# Altium PCB PCB_bee.PcbDoc
Units mm, origin at the board's own origin, x right, y up, seen from the top; angles counter-clockwise.
Board outline 279.91 x 60.2 mm, 2 copper layers (Top Layer, Bottom Layer), stack 0.54 mm thick; 45 components, 24 nets, 183 pads, 44 vias.
Unrouted connection lines stored in the file: 1.
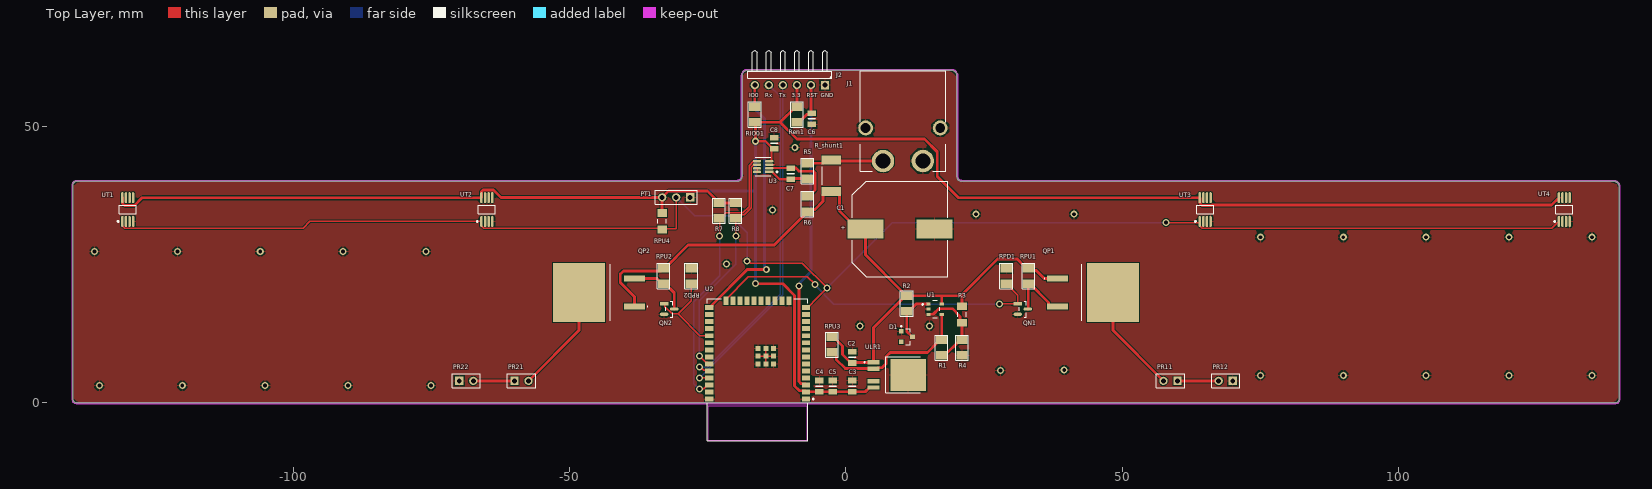
[diagram p0: Top Layer view]
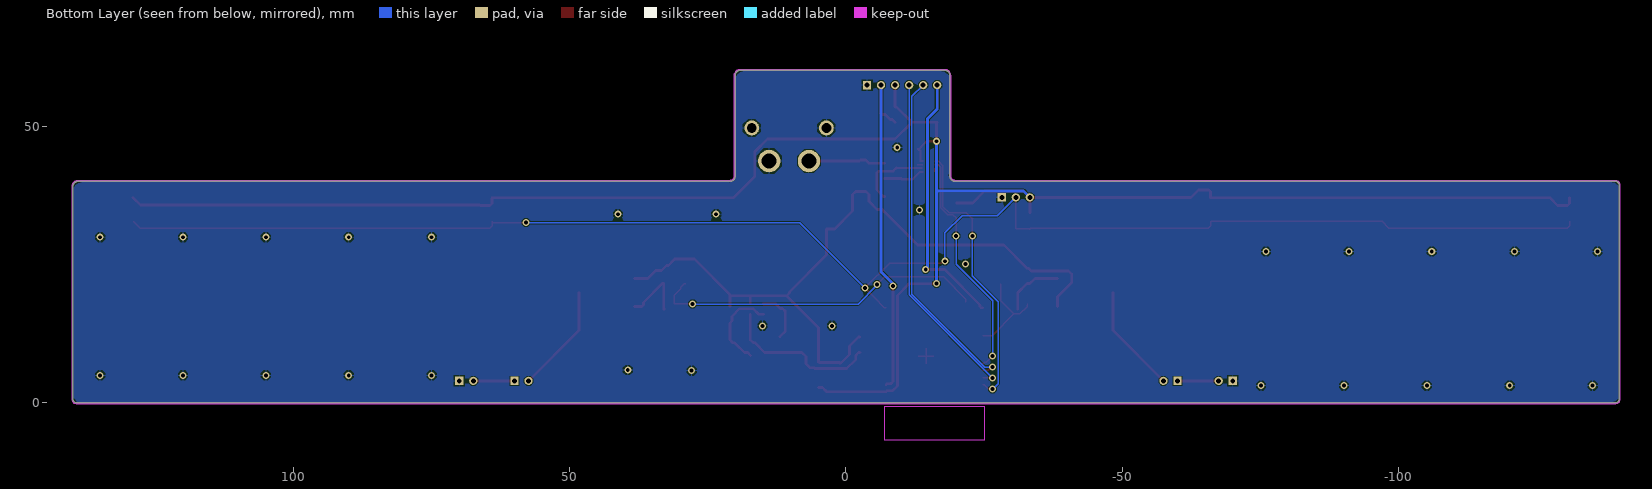
[diagram p1: Bottom Layer view, seen from below]
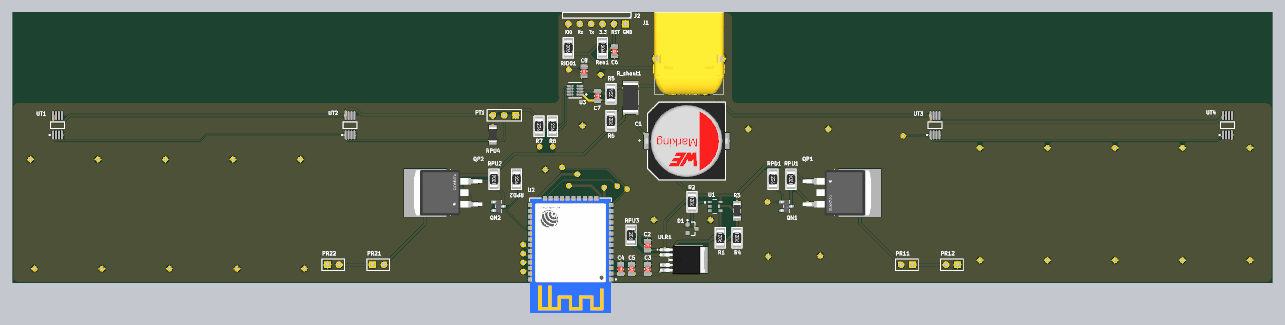
[diagram p2: 3D render of the assembled board from above, using the file's embedded part models]

## Layer stack, top to bottom
Top Solder: solder mask 0.23, Solder Resist, Dk 3.5
Top Layer: signal copper 0.07
Dielectric 1: dielectric 0.4, FR-4, Dk 4.8
Bottom Layer: signal copper 0.07
Bottom Solder: solder mask 0.23, Solder Resist, Dk 3.5

## Board outline
-18.796,41.021 -18.796,59.309 cw(c-17.907,59.309) -17.907,60.198 19.177,60.198 cw(c19.177,59.309) 20.066,59.309 20.066,41.021 ccw(c20.955,41.021) 20.955,40.132 138.938,40.132 cw(c138.938,39.116) 139.954,39.116 139.954,0.762 cw(c139.192,0.762) 139.192,0 -139.192,0 cw(c-139.192,0.762) -139.954,0.762 -139.954,39.37 cw(c-139.192,39.37) -139.192,40.132 -19.685,40.132 ccw(c-19.685,41.021)

## Design rules (kind name [scope] priority, off if disabled: settings)
Clearance Powerline [InNetClass('Power signal')] p1: gap=0.127 ignorepadtopadclearanceinfootprint=FALSE except(0.3: Arc-Arc Arc-Track Arc-Via Arc-Hole Track-Track Track-Via Track-Hole THPad-Via THPad-Hole Via-Via Via-Hole Fill-Hole Poly-Hole Region-Hole Text-Hole)
Clearance [All] p2: gap=0.127 ignorepadtopadclearanceinfootprint=FALSE
HoleSize [All] p1: absolutevalues=TRUE maxlimit=5.1 minlimit=0.025 maxpercent=80.000 minpercent=20.000
MinimumSolderMaskSliver [All] p1: minsoldermaskwidth=0.127
PolygonConnect [All] p1: connectstyle=Relief reliefconductorwidth=0.254 reliefentries=4 polygonreliefangle="90 Angle" airgapwidth=0.254
RoutingVias [All] p1: holewidth=0.711 width=1.27 viastyle="Through Hole" minholewidth=0.711 minwidth=1.27 maxholewidth=0.711 maxwidth=1.27
SilkToSolderMaskClearance [IsPad] p1: minsilkscreentomaskgap=0.127 clearancetoexposedcopper=TRUE
SolderMaskExpansion [All] p1: expansion=0.102 istentingtop=FALSE
UnRoutedNet [All] p1: checkbadconnections=TRUE
Width "Power width" [InNetClass('Power signal')] p1: maxlimit=0.51 minlimit=0.381 preferedwidth=0.51 minimp=50.000000 maximp=50.000000 favimp=50.000000
Width [All] p2: maxlimit=0.254 minlimit=0.127 preferedwidth=0.254 bottomlayer_minwidth=0.254 minimp=50.000000 maximp=50.000000 favimp=50.000000 checkconnectedcopper=TRUE
26 further rules are at their usual default settings.

## Classes and differential pairs
net class "Power signal": 3.3V Enable3.3 In+ In- IO0 NetC7_1 NetC7_2 NetPR11_1 NetPR21_1 NetQN1_3 NetQN2_3 Powerline Powerline2 ResistorIn ResistorIn2 RST_esp32

## Components (designator, comment, footprint, x,y, rotation, side; value= is the part's Value field where it differs from the comment)
C1 "865080663020" WCAP-ASLI_D16H17 9.779,31.496 r180 top
C2 "GCM21BR71H104KA37K" SMD-0805C 1.143,8.255 r180 top value=0.10µF
C3 "GRM21BR6YA106ME43L" SMD-0805C 1.143,3.048 r180 top value=10µF
C4 "GCM21BR71H104KA37K" SMD-0805C -4.826,3.048 r180 top value=0.10µF
C5 "GRM21BR6YA106ME43L" SMD-0805C -2.413,3.048 r180 top value=10µF
C6 "GRJ21BR71H105KE01L" SMD-0805C -6.223,51.435 r0 top value=1µF
C7 "GCM21BR71H104KA37K" SMD-0805C -10,41.5 r180 top value=0.10µF
C8 "GCM21BR71H104KA37K" SMD-0805C -13,47 r0 top value=0.10µF
D1 "BZX84C6V8LT1G" ONSC-SOT-23-3-318-08_V 11,12 r0 top
J1 "XT60PW-M" XT60PWM 10.306,43.784 r0 top locked
J2 "Header 6H" HDR1X6H -3.81,57.531 r180 top locked
PR11 "Header 2" HDR1X2 60,4 r180 top
PR12 "Header 2" HDR1X2 70,4 r180 top
PR21 "Header 2" HDR1X2 -60,4 r0 top
PR22 "Header 2" HDR1X2 -70,4 r0 top
PT1 "Header 3" HDR1X3 -28.194,37.211 r180 top
QN1 "BSS138" FP-318-08-IPC_B 32,17 r0 top
QN2 "BSS138" FP-318-08-IPC_B -32,17 r0 top
QP1 "FQB22P10TM" FQB22P10TM 45,20 r270 top
QP2 "FQB22P10TM" FQB22P10TM -45,20 r90 top
R1 "ERJ-P08J153V" SMD-1206-RES 17.272,10 r180 top value=15k
R2 "ERJ-P08J821V" SMD-1206-RES 11,18 r180 top value=820
R3 "Resistor 4k7 +/-1% 1206 250 mW" RESC3116X70X50ML13T20 21,16 r90 top value=4.7k
R4 "ERJ-P08J102V" SMD-1206-RES 21,10 r180 top value=1k
R5 "ERJ-8ENF10R2V" SMD-1206-RES -7,42 r0 top value=10.2
R6 "ERJ-8ENF10R2V" SMD-1206-RES -7,36 r180 top value=10.2
R7 "ERJ-8GEYJ332V" SMD-1206-RES -23,34.798 r180 top value=3.3k
R8 "ERJ-8GEYJ332V" SMD-1206-RES -20,34.798 r180 top value=3.3k
R_shunt1 "WSLT2512R5000FEA" RESC6432X89X76NL25T25 -2.667,41.148 r90 top
Ren1 "ERJ-P08J104V" SMD-1206-RES -8.89,52.197 r180 top value=100k
RIO01 "ERJ-P08J104V" SMD-1206-RES -16.51,52.197 r180 top value=100k
RPD1 "ERJ-P08J333V" SMD-1206-RES 29,23 r180 top value=33k
RPD2 "ERJ-P08J333V" SMD-1206-RES -28,23 r180 top value=33k
RPU1 "ERJ-P08J333V" SMD-1206-RES 33,23 r0 top value=33k
RPU2 "ERJ-P08J333V" SMD-1206-RES -33,23 r0 top value=33k
RPU3 "ERJ-P08J333V" SMD-1206-RES -2.54,10.541 r180 top value=33k
RPU4 "Resistor 4k7 +/-1% 1206 250 mW" RESC3116X70X50ML13T20 -33.274,32.893 r90 top value=4.7k
U1 "AP331AWG-7" FP-SOT25-MFG 16.129,17 r0 top
U2 "ESP32-WROOM-32E (16MB)" FP-ESP32-WROOM-32E_16MB-MFG -16,6 r180 top
U3 "INA219AIDCNR" FP-DCN0008A-IPC_B -15,42.799 r180 top
ULR1 "TLS850B0TEV33ATMA1" BTS6143D 8.353,5.083 r270 top
UT1 "DS18B20U+T&R" MAXM-U8+1_M -130,35 r90 top
UT2 "DS18B20U+T&R" MAXM-U8+1_M -65,35 r90 top
UT3 "DS18B20U+T&R" MAXM-U8+1_M 65,35 r90 top
UT4 "DS18B20U+T&R" MAXM-U8+1_M 130,35 r90 top

## Footprints (in the part's own frame and the unit in brackets; to place one, negate y for a bottom-side part, rotate by r counter-clockwise, add the part's x,y. Pads: shape width x height; smd on the part's side, far side on the other; paste and mask are expansions set on the pad)
BTS6143D [mm]
  rect 0.8x2.2 smd: 1(-2.28,-3.4) 2(-1.14,-3.4) 4(1.14,-3.4) 5(2.28,-3.4)
  rect 5.8x6.4 smd: 3(0,2.9)
  silkscreen extent -3.25,-5.1 3.25,5.1, body extent -3.25,-4.49 3.25,5.49, height 2.45
FP-318-08-IPC_B [mm]
  rect 1.524x0.578 smd paste+0 mask+0: 1(-0.91,0.95)
  rrect100% 1.524x0.578 smd paste+0 mask+0: 2(-0.91,-0.95) 3(0.91,0)
  silkscreen extent -0.65,-1.45 0.65,1.45, body extent -1.92,-1.7 1.92,1.7, height 0.25
FP-DCN0008A-IPC_B [mm]
  rect 1.505x0.455 smd paste+0 mask+0: 1(-1.1,0.975)
  rrect100% 1.505x0.455 smd paste+0 mask+0: 2(-1.1,0.325) 3(-1.1,-0.325) 4(-1.1,-0.975) 5(1.1,-0.975) 6(1.1,-0.325) 7(1.1,0.325) 8(1.1,0.975)
  silkscreen extent -2.63,-1.7 1.4,1.7, body extent -2.1,-1.7 2.1,1.7, height 0.25
FP-ESP32-WROOM-32E_16MB-MFG [mm]
  rect 1.5x0.9 smd paste+0 mask+0: 1(-8.75,5.26) 2(-8.75,3.99) 3(-8.75,2.72) 4(-8.75,1.45) 5(-8.75,0.18) 6(-8.75,-1.09) 7(-8.75,-2.36) 8(-8.75,-3.63) 9(-8.75,-4.9) 10(-8.75,-6.17) 11(-8.75,-7.44) 12(-8.75,-8.71) 13(-8.75,-9.98) 14(-8.75,-11.25) 25(8.75,-11.25) 26(8.75,-9.98) 27(8.75,-8.71) 28(8.75,-7.44) 29(8.75,-6.17) 30(8.75,-4.9) 31(8.75,-3.63) 32(8.75,-2.36) 33(8.75,-1.09) 34(8.75,0.18) 35(8.75,1.45) 36(8.75,2.72) 37(8.75,3.99) 38(8.75,5.26)
  rect 0.9x1.5 smd paste+0 mask+0: 15(-5.715,-12.5) 16(-4.445,-12.5) 17(-3.175,-12.5) 18(-1.905,-12.5) 19(-0.635,-12.5) 20(0.635,-12.5) 21(1.905,-12.5) 22(3.175,-12.5) 23(4.445,-12.5) 24(5.715,-12.5)
  rect 0.9x0.9 smd paste+0 mask+0: 39(-2.9,-1.06) 39(-2.9,-3.86) 39(-2.9,-2.46) 39(-1.5,-1.06) 39(-1.5,-2.46) 39(-1.5,-3.86) 39(-0.1,-1.06) 39(-0.1,-2.46) 39(-0.1,-3.86)
  Keep-Out Layer region: -9,6.562 9,6.562 9,12.752 -9,12.752
  silkscreen extent -10.2,-12.83 9.07,12.82, body extent -9.6,-13.35 9.6,12.93, height 0.25
FP-SOT25-MFG [mm]
  rect 0.8x0.55 smd paste+0 mask+0: 1(-1.2,0.95) 2(-1.2,0) 3(-1.2,-0.95) 4(1.2,-0.95) 5(1.2,0.95)
  silkscreen extent -2.37,-1.55 0.85,1.55, body extent -1.7,-1.65 1.7,1.65, height 0.25
FQB22P10TM [mm]
  rect 1.05x3.8 smd: 1(-2.54,-6.692) 3(2.54,-6.692)
  rect 10.67x9.45 smd: 2(0,3.307)
  silkscreen extent -5.08,-9.1 5.08,-2.32, body extent -5.08,-9.4 5.08,5.85, height 5.08
HDR1X2 [mm] "Connector; Header; 2 Position"
  rect 1.5x1.5 hole 0.9: 1(0,0)
  round 1.5 hole 0.9: 2(2.54,0)
  silkscreen extent -1.27,-1.27 3.81,1.27
HDR1X3 [mm] "Connector; Header; 3 Position"
  rect 1.5x1.5 hole 0.9: 1(0,0)
  round 1.5 hole 0.9: 2(2.54,0) 3(5.08,0)
  silkscreen extent -1.27,-1.27 6.35,1.27
HDR1X6H [mm] "Connector; Header; 6 Position; Right Angle"
  rect 1.5x1.5 hole 0.9: 1(0,0)
  round 1.5 hole 0.9: 2(2.54,0) 3(5.08,0) 4(7.62,0) 5(10.16,0) 6(12.7,0)
  silkscreen extent -1.27,-6.35 13.97,-1.27
MAXM-U8+1_M [mm] "SOP, 8-Leads, Body 3x3mm, Pitch 0.65mm, IPC Low Density"
  oval 2x0.45 smd: 1(-2.15,0.975) 2(-2.15,0.325) 3(-2.15,-0.325) 4(-2.15,-0.975) 5(2.15,-0.975) 6(2.15,-0.325) 7(2.15,0.325) 8(2.15,0.975)
  silkscreen extent -2.27,-1.55 0.75,1.87, body extent -1.55,-1.55 1.55,1.55, height 1.1
ONSC-SOT-23-3-318-08_V [mm] "SOT23, 3-Leads, Body 2.92x1.3mm, Pitch 0.95mm"
  rect 0.9x0.8 smd: 1(-1,0.95) 2(-1,-0.95) 3(1,0)
  silkscreen extent -1.12,-1.46 0.65,2.02, body extent -0.65,-1.46 0.65,1.46, height 1.11
RESC3116X70X50ML13T20 [mm] "Chip Resistor, 2-Leads, Body 3.25x1.65mm, IPC Low Density"
  rect 1.4x1.75 smd: 1(-1.5,0) 2(1.5,0)
  silkscreen extent -0.4,-0.78 0.4,0.77, body extent -1.63,-0.82 1.63,0.82, height 0.7
RESC6432X89X76NL25T25 [mm] "Chip Resistor, 2-Leads, Body 6.6x3.43mm, IPC Medium Density"
  rect 1.65x3.45 smd: 1(-2.85,0) 2(2.85,0)
  silkscreen extent -1.65,-1.62 1.65,1.62, body extent -3.3,-1.72 3.3,1.72, height 0.89
SMD-0805C [mil]
  rect 60x40 smd: 1(0,40) 2(0,-40)
  silkscreen extent -25,0 25,0, body extent -25,-39 25,39, height 35
SMD-1206-RES [mil]
  rect 80x60 smd: 1(0,55) 2(0,-55)
  silkscreen extent -45,-90 45,90, body extent -34,-66 34,66, height 33
WCAP-ASLI_D16H17 [mm] "Aluminium Electrolytic V-Chip SMT Capacitors, 16x17mm"
  rect 6.5x3.5 smd: 1(6.25,0) 2(-6.25,0)
  silkscreen extent -8.65,-8.65 8.65,8.65, body extent -9.15,-8.5 9.15,8.5, height 17
XT60PWM [mm]
  round 4.05 hole 2.7: 1(-3.6,0) 2(3.6,0)
  round 2.7 hole 1.8: 3(6.75,6) 4(-6.75,6)
  silkscreen extent -7.75,-1.85 7.75,16.35, body extent -7.95,-1.98 7.95,16.3, height 8.44

## Part data
C1: library part CMP-03913-53914628-1, "865080663020 WCAP-ASLI Aluminum Electrolytic Capacitors", Capacitance=1mF, Case/Package=Radial, ESR (Equivalent Series Resistance)=60.8615mΩ, Insulation Resistance=100kΩ, Leakage Current=500µA, Max Operating Temperature=105°C, Min Operating Temperature=-55°C, Ripple Current=1A, Tolerance=20%, Voltage Rating=50V, Diameter=16mm, Height=17mm, Height - Seated (Max)=16.9926mm, Impedance=78mΩ, Length=17mm, Life (Hours)=2000hours, Mount="Surface Mount", NexarPartId=53914628, Packaging="Tape & Reel (TR)", Polarity=Polar, REACH SVHC=Unknown, Ripple Current (AC)=1A, RoHS=Compliant, Voltage Rating (DC)=50V, Width=17.1mm
C2 C4 C7 C8: library part CMP-026-000437-1, "CAP CER 0.1UF 50V X7R 0805", Digi-Key Part Number=490-8049-1-ND, Manufacturer="Murata Electronics North America", Operating Temperature="-55°C ~ 125°C", Package / Case="0805 (2012 Metric)", Ratings=AEC-Q200, Temperature Coefficient=X7R, Tolerance=±10%, Voltage=50V, @ qty=0, Applications=Automotive, Datasheets=http://www.murata.com/~/media/webrenewal/support/library/catalog/products/capacitor/mlcc/c03e.ashx, Factory Stock=0, Features=-, Height - Seated (Max)=-, Image=//media.digikey.com/photos/Murata%20Photos/NCP,GCM%20SERIES%200805.jpg, Lead Spacing=-, Lead Style=-, Minimum Quantity=1, Mounting Type="Surface Mount, MLCC", Packaging="Cut Tape (CT)", Part Number=GCM21BR71H104KA37K, Part Status=Active, Quantity Available=322, Series=GCM, Size / Dimension="0.079\" L x 0.049\" W (2.00mm x 1.25mm)", Thickness (Max)="0.055\" (1.40mm)", Unit Price (USD)=0.12
C3 C5: library part CMP-026-000648-1, "CAP CER 10UF 35V X5R 0805", Digi-Key Part Number=490-10515-1-ND, Manufacturer="Murata Electronics North America", Operating Temperature="-55°C ~ 85°C", Package / Case="0805 (2012 Metric)", Ratings=-, Temperature Coefficient=X5R, Tolerance=±20%, Voltage=35V, @ qty=0, Applications="General Purpose", Datasheets=http://www.murata.com/~/media/webrenewal/support/library/catalog/products/capacitor/mlcc/c02e.pdf, Factory Stock=0, Features="Derating Recommended", Height - Seated (Max)=-, Image=//media.digikey.com/Renders/Murata%20Renders/0805%20(2012%20Metric)%20.85mm.jpg, Lead Spacing=-, Lead Style=-, Minimum Quantity=1, Mounting Type="Surface Mount, MLCC", Packaging="Cut Tape (CT)", Part Number=GRM21BR6YA106ME43L, Part Status=Active, Quantity Available=79139, Series=GRM, Size / Dimension="0.079\" L x 0.049\" W (2.00mm x 1.25mm)", Thickness (Max)="0.057\" (1.45mm)", Unit Price (USD)=0.33
C6: library part CMP-026-000525-1, "CAP CER 1UF 50V X7R 0805", Digi-Key Part Number=490-10924-1-ND, Manufacturer="Murata Electronics North America", Operating Temperature="-55°C ~ 125°C", Package / Case="0805 (2012 Metric)", Ratings=-, Temperature Coefficient=X7R, Tolerance=±10%, Voltage=50V, @ qty=0, Applications="Boardflex Sensitive", Datasheets=http://www.murata.com/~/media/webrenewal/support/library/catalog/products/capacitor/mlcc/c02e.pdf, Factory Stock=0, Features="Soft Termination", Height - Seated (Max)=-, Image=//media.digikey.com/Renders/Murata%20Renders/0805%20(2012%20Metric)%20.85mm.jpg, Lead Spacing=-, Lead Style=-, Minimum Quantity=1, Mounting Type="Surface Mount, MLCC", Packaging="Cut Tape (CT)", Part Number=GRJ21BR71H105KE01L, Part Status=Active, Quantity Available=2092, Series=GRJ, Size / Dimension="0.079\" L x 0.049\" W (2.00mm x 1.25mm)", Thickness (Max)="0.057\" (1.45mm)", Unit Price (USD)=0.26
D1: library part CMP-1060-00902-1, "Zener Voltage Regulator, 225 mW, 3-Pin SOT-23, Pb-Free, Tape and Reel", Manufacturer="On Semiconductor", ComponentLink1Description="Manufacturer URL", ComponentLink1URL=http://www.onsemi.com/, ComponentLink2Description=Datasheet, ComponentLink2URL=http://www.onsemi.com/pub_link/Collateral/BZX84C2V4LT1-D.PDF, ComponentLink3Description="Package Specification", ComponentLink3URL=http://www.onsemi.cn/pub_link/Collateral/318-08.PDF, DatasheetVersion="Rev. 17", Mounting Technology="Surface Mount", PackageDescription="3-Pin Small Outline Transistor, Body 2.92 x 1.3 mm, Pitch 0.95 mm", PackageReference=SOT-23-3-318-08, PackageVersion="Rev. AP, 11/2009", Packing="Tape and Reel", PartNumber=BZX84C6V8LT1G, RoHS=Pb-Free
J1: "Connector", Manufacturer_Name="Changzou Amass Elec", Datasheet Link=https://www.tme.eu/Document/9b8d0c5eb7094295f3d3112c214d3ade/XT60PW%20SPEC.pdf, Height=8.4mm, Manufacturer_Part_Number=XT60PW-M
J2: "Header, 6-Pin, Right Angle", Supplier Part Number 1=8281660, LatestRevisionDate=17-Jul-2002, LatestRevisionNote="Re-released for DXP Platform.", Publisher="Altium Limited", Supplier 1=Rs
PR11 PR12 PR21 PR22: "Header, 2-Pin", LatestRevisionDate=17-Jul-2002, LatestRevisionNote="Re-released for DXP Platform.", Publisher="Altium Limited"
PT1: "Header, 3-Pin", LatestRevisionDate=17-Jul-2002, LatestRevisionNote="Re-released for DXP Platform.", Publisher="Altium Limited"
QN1 QN2: library part CMP-07173-000101-1, "MOSFET N-CH 50V 220MA SOT-23", Case/Package=SOT-23, Continuous Drain Current (ID)=220mA, Drain to Source Breakdown Voltage=50V, Drain to Source Resistance=3.5R, Gate to Source Voltage (Vgs)=20V, Input Capacitance=27pF, Max Operating Temperature=150°C, Max Power Dissipation=360mW, Min Operating Temperature=-55°C, On-State Resistance=6R, Package Quantity=1, Threshold Voltage=1.3V, Contact Plating=Tin, Current Rating=220mA, Drain to Source Voltage (Vdss)=50V, Dual Supply Voltage=50V, Element Configuration=Single, Fall Time=9ns, Height=0.93mm, Lead Free="Lead Free", Length=2.92mm, Mount="Surface Mount", Nominal Vgs=1.3V, Number of Elements=1, Number of Pins=3, Packaging="Tape and Reel", Power Dissipation=360mW, Radiation Hardening=No, Rds On Max=3.5R, REACH SVHC="No SVHC", Rise Time=9ns, Termination=SMD/SMT, Turn-Off Delay Time=20ns, Turn-On Delay Time=2.5ns, Voltage Rating (DC)=50V, Weight=0.03g, Width=1.3mm
QP1 QP2: "MOSFET (P-Channel)", Manufacturer_Name=onsemi, Mouser Part Number=512-FQB22P10TM, Arrow Part Number=FQB22P10TM, Arrow Price/Stock=https://www.arrow.com/en/products/fqb22p10tm/on-semiconductor?region=europe, Datasheet Link=https://www.onsemi.cn/download/data-sheet/pdf/fqb22p10-d.pdf, Height=5.08mm, Manufacturer_Part_Number=FQB22P10TM, Mouser Price/Stock=https://www.mouser.co.uk/ProductDetail/ON-Semiconductor-Fairchild/FQB22P10TM?qs=u3sZpSG73%252B7bL0dxrg7qrg%3D%3D
R1: library part CMP-015-001045-1, "RES SMD 15K OHM 5% 2/3W 1206", Digi-Key Part Number=P15KALCT-ND, Manufacturer="Panasonic Electronic Components", Operating Temperature="-55°C ~ 155°C", Package / Case="1206 (3216 Metric)", Power (Watts)="0.667W, 2/3W", Supplier Device Package=1206, Temperature Coefficient=±200ppm/°C, Tolerance=±5%, @ qty=1500, Composition="Thick Film", Datasheets=https://industrial.panasonic.com/cdbs/www-data/pdf/RDA0000/AOA0000C243.pdf, Factory Stock=0, Failure Rate=-, Features="Automotive AEC-Q200, Pulse Withstanding", Height - Seated (Max)="0.028\" (0.70mm)", Image=//media.digikey.com/Renders/Panasonic%20Renders/ERJ-1206%20Pkg.jpg, Minimum Quantity=1, Number of Terminations=2, Packaging="Cut Tape (CT)", Part Number=ERJ-P08J153V, Part Status=Active, Quantity Available=10955, Series=ERJ, Size / Dimension="0.126\" L x 0.063\" W (3.20mm x 1.60mm)", Unit Price (USD)=0.02178
R2: library part CMP-015-001133-1, "RES SMD 820 OHM 5% 2/3W 1206", Digi-Key Part Number=P820ALCT-ND, Manufacturer="Panasonic Electronic Components", Operating Temperature="-55°C ~ 155°C", Package / Case="1206 (3216 Metric)", Power (Watts)="0.667W, 2/3W", Supplier Device Package=1206, Temperature Coefficient=±200ppm/°C, Tolerance=±5%, @ qty=1500, Composition="Thick Film", Datasheets=https://industrial.panasonic.com/cdbs/www-data/pdf/RDA0000/AOA0000C243.pdf, Factory Stock=0, Failure Rate=-, Features="Automotive AEC-Q200, Pulse Withstanding", Height - Seated (Max)="0.028\" (0.70mm)", Image=//media.digikey.com/Renders/Panasonic%20Renders/ERJ-1206%20Pkg.jpg, Minimum Quantity=1, Number of Terminations=2, Packaging="Cut Tape (CT)", Part Number=ERJ-P08J821V, Part Status=Active, Quantity Available=13581, Series=ERJ, Size / Dimension="0.126\" L x 0.063\" W (3.20mm x 1.60mm)", Unit Price (USD)=0.02178
R3 RPU4: library part CMP-009-00033-5, "Chip Resistor, 4.7 KOhm, +/- 1%, 0.25 W, -55 to 155 degC, 1206 (3216 Metric)", Case/Package=1206, Max Operating Temperature=155°C, Min Operating Temperature=-55°C, Power=250mW, Tolerance=1%, Voltage Rating=200V, Mounting Technology=SM, Pins=2, RoHS Compliant=True
R4: library part CMP-015-001023-1, "RES SMD 1K OHM 5% 2/3W 1206", Digi-Key Part Number=P1.0KALCT-ND, Manufacturer="Panasonic Electronic Components", Operating Temperature="-55°C ~ 155°C", Package / Case="1206 (3216 Metric)", Power (Watts)="0.667W, 2/3W", Supplier Device Package=1206, Temperature Coefficient=±200ppm/°C, Tolerance=±5%, @ qty=1500, Composition="Thick Film", Datasheets=https://industrial.panasonic.com/cdbs/www-data/pdf/RDA0000/AOA0000C243.pdf, Factory Stock=0, Failure Rate=-, Features="Automotive AEC-Q200, Pulse Withstanding", Height - Seated (Max)="0.028\" (0.70mm)", Image=//media.digikey.com/Renders/Panasonic%20Renders/ERJ-1206%20Pkg.jpg, Minimum Quantity=1, Number of Terminations=2, Packaging="Cut Tape (CT)", Part Number=ERJ-P08J102V, Part Status=Active, Quantity Available=85126, Series=ERJ, Size / Dimension="0.126\" L x 0.063\" W (3.20mm x 1.60mm)", Unit Price (USD)=0.02178
R5 R6: library part CMP-015-000202-1, "RES SMD 10.2 OHM 1% 1/4W 1206", Digi-Key Part Number=P10.2FCT-ND, Manufacturer="Panasonic Electronic Components", Operating Temperature="-55°C ~ 155°C", Package / Case="1206 (3216 Metric)", Power (Watts)="0.25W, 1/4W", Supplier Device Package=1206, Temperature Coefficient=±100ppm/°C, Tolerance=±1%, @ qty=1500, Composition="Thick Film", Datasheets=http://industrial.panasonic.com/www-cgi/jvcr13pz.cgi?E+PZ+3+AOA0002+ERJ8ENF10R2V+7+WW, Factory Stock=0, Failure Rate=-, Features="Automotive AEC-Q200", Height - Seated (Max)="0.028\" (0.70mm)", Image=//media.digikey.com/Renders/Panasonic%20Renders/ERJ-1206%20Pkg.jpg, Minimum Quantity=1, Number of Terminations=2, Packaging="Cut Tape (CT)", Part Number=ERJ-8ENF10R2V, Part Status=Active, Quantity Available=19753, Series=ERJ, Size / Dimension="0.126\" L x 0.063\" W (3.20mm x 1.60mm)", Unit Price (USD)=0.00933
R7 R8: library part CMP-015-000849-1, "RES SMD 3.3K OHM 5% 1/4W 1206", Digi-Key Part Number=P3.3KECT-ND, Manufacturer="Panasonic Electronic Components", Operating Temperature="-55°C ~ 155°C", Package / Case="1206 (3216 Metric)", Power (Watts)="0.25W, 1/4W", Supplier Device Package=1206, Temperature Coefficient=±200ppm/°C, Tolerance=±5%, @ qty=1500, Composition="Thick Film", Datasheets=http://industrial.panasonic.com/www-cgi/jvcr13pz.cgi?E+PZ+3+AOA0001+ERJ8GEYJ332V+7+WW, Factory Stock=0, Failure Rate=-, Features="Automotive AEC-Q200", Height - Seated (Max)="0.028\" (0.70mm)", Image=//media.digikey.com/Renders/Panasonic%20Renders/ERJ-1206%20Pkg.jpg, Minimum Quantity=1, Number of Terminations=2, Packaging="Cut Tape (CT)", Part Number=ERJ-8GEYJ332V, Part Status=Active, Quantity Available=426004, Series=ERJ, Size / Dimension="0.126\" L x 0.063\" W (3.20mm x 1.60mm)", Unit Price (USD)=0.00700
R_shunt1: library part CMP-1666-00017-2, "Chip Resistor, 0.5 Ohm, +/- 1%, 1 W, -65 to 275 degC, 2512 (6432 Metric), RoHS, Tape and Reel", Case Code (Imperial)=2512, Case Code (Metric)=6432, Max Operating Temperature="275 degC", Min Operating Temperature="-65 degC", Resistance="0.5 Ohm", Tolerance=1%, Case/Package=2512, ComponentLink1Description="Manufacturer URL", ComponentLink1URL=http://www.vishay.com/, ComponentLink2Description=Datasheet, ComponentLink2URL=http://www.farnell.com/datasheets/1813046.pdf, DatasheetVersion=11/2011, Height="0.635 mm", Length="6.35 mm", Mounting Technology="Surface Mount", PackageDescription="2-Pin Surface Mount Device, Body 6.35 x 3.18 mm", Packaging="Tape and Reel", PartNumber=WSLT2512R5000FEA, Radiation Hardening=No, REACH SVHC=Unknown, RoHSCompliant=True, Width="3.2 mm"
Ren1 RIO01: library part CMP-015-001025-1, "RES SMD 100K OHM 5% 2/3W 1206", Digi-Key Part Number=P100KALCT-ND, Manufacturer="Panasonic Electronic Components", Operating Temperature="-55°C ~ 155°C", Package / Case="1206 (3216 Metric)", Power (Watts)="0.667W, 2/3W", Supplier Device Package=1206, Temperature Coefficient=±200ppm/°C, Tolerance=±5%, @ qty=1500, Composition="Thick Film", Datasheets=https://industrial.panasonic.com/cdbs/www-data/pdf/RDA0000/AOA0000C243.pdf, Factory Stock=0, Failure Rate=-, Features="Automotive AEC-Q200, Pulse Withstanding", Height - Seated (Max)="0.028\" (0.70mm)", Image=//media.digikey.com/Renders/Panasonic%20Renders/ERJ-1206%20Pkg.jpg, Minimum Quantity=1, Number of Terminations=2, Packaging="Cut Tape (CT)", Part Number=ERJ-P08J104V, Part Status=Active, Quantity Available=9, Series=ERJ, Size / Dimension="0.126\" L x 0.063\" W (3.20mm x 1.60mm)", Unit Price (USD)=0.02178
RPD1 RPD2 RPU1 RPU2 RPU3: library part CMP-015-001084-1, "RES SMD 33K OHM 5% 2/3W 1206", Digi-Key Part Number=P33KALCT-ND, Manufacturer="Panasonic Electronic Components", Operating Temperature="-55°C ~ 155°C", Package / Case="1206 (3216 Metric)", Power (Watts)="0.667W, 2/3W", Supplier Device Package=1206, Temperature Coefficient=±200ppm/°C, Tolerance=±5%, @ qty=1500, Composition="Thick Film", Datasheets=https://industrial.panasonic.com/cdbs/www-data/pdf/RDA0000/AOA0000C243.pdf, Factory Stock=0, Failure Rate=-, Features="Automotive AEC-Q200, Pulse Withstanding", Height - Seated (Max)="0.028\" (0.70mm)", Image=//media.digikey.com/Renders/Panasonic%20Renders/ERJ-1206%20Pkg.jpg, Minimum Quantity=1, Number of Terminations=2, Packaging="Cut Tape (CT)", Part Number=ERJ-P08J333V, Part Status=Active, Quantity Available=25960, Series=ERJ, Size / Dimension="0.126\" L x 0.063\" W (3.20mm x 1.60mm)", Unit Price (USD)=0.02178
U1: library part CMP-12735-000001-1, "IC COMPARATOR SGL DIFF SOT-25", Ambient Temperature Range High=+70°C, Ambient Temperature Range Low=0°C, Input Bias Current=0.15uA, Input Offset Voltage=4mV, Manufacturer="Diodes Inc.", Max Dual Supply Voltage=18V, Max Junction Temp=+150°C, Max Supply Voltage=36V, Min Dual Supply Voltage=1V, Min Supply Voltage=2V, Nominal Supply Current=0.4-1mA, Output Current Per Channel=16mA, Package=SOT25, Temperature="0°C to +70°C", Voltage Gain=200V/mV, Automotive=No, Category=IC, ComponentLink2Description=Datasheet, ComponentLink2URL=https://www.diodes.com/assets/Datasheets/AP331A.pdf, Device Class L1="Integrated Circuits (ICs)", Device Class L2="Linear ICs", Device Class L3=Comparators, Digikey Description="IC COMPARATOR SGL DIFF SOT-25", Footprint Url=https://www.diodes.com/assets/Package-Files/SOT25.pdf, Height=1.4mm, Lead Free=Yes, Manufacturer Part Number=AP331AWG-7, Mouser Description="Analog Comparators 2V-36V 2.5mA 2V-36V 2.5mA", Number Of Channels=1, Octopart=https://octopart.com/ap331awg-7-diodes+inc.-12688108, Response Time=300ns, RoHS=TRUE, Standoff Height=0.013mm, Temperature Range High=+70°C, Temperature Range Low=0°C
U2: library part CMP-194065-000027-1, "RX TXRX MOD WIFI TRACE ANT SMD"
U3: library part CMP-0704-00041-3, "IC CURRENT MONITOR 1% SOT23-8", Case/Package=SOT-23-8, Input Offset Voltage (Vos)=100uV, Max Input Voltage=26V, Max Operating Temperature=125°C, Max Supply Current=5mA, Max Supply Voltage=5.5V, Min Input Voltage=0V, Min Operating Temperature=-40°C, Min Supply Voltage=3V, Nominal Supply Current=700uA, Operating Supply Current=1mA, Output Current=10mA, Package Quantity=3000, Accuracy=1%, Bandwidth=3.4MHz, Common Mode Rejection Ratio=100dB, Contact Plating=Gold, Features=I²C, Height=1.3mm, Lead Free="Lead Free", Length=3mm, Number of Amplifiers=1, Number of Pins=8, Output Current Per Channel=10mA, Output Type=Digital, Packaging="Tape and Reel", Quiescent Current=700uA, Radiation Hardening=No, REACH SVHC="No SVHC", RoHS Compliant=Yes, Series=Zero-Drift, Supply Current=700uA, Weight=0.001411oz, Width=1.75mm
ULR1: "Integrated Circuit", Manufacturer_Name=Infineon, Mouser Part Number=726-TLS850B0TEV33ATM, Arrow Part Number=TLS850B0TEV33ATMA1, Arrow Price/Stock=https://www.arrow.com/en/products/tls850b0tev33atma1/infineon-technologies-ag?region=nac, Datasheet Link=https://componentsearchengine.com/Datasheets/1/TLS850B0TEV33ATMA1.pdf, Height=2mm, Manufacturer_Part_Number=TLS850B0TEV33ATMA1, Mouser Price/Stock=https://www.mouser.co.uk/ProductDetail/Infineon-Technologies/TLS850B0TEV33ATMA1?qs=W0yvOO0ixfGvA2FkIMPoCw%3D%3D
UT1 UT2 UT3 UT4: library part CMP-0253-00024-2, "High-Precision 1-Wire Digital Thermometer, -55 to 125 degC, 8-Pin SOP (U8+1), Pb-Free, Tape and Reel", Generic Part Number=DS18B20, Temp. Thresh.="Programmable (NV)", Code_JEDEC=MO-187, ComponentLink1Description="Manufacturer URL", ComponentLink1URL=http://www.maximintegrated.com/, ComponentLink2Description=Datasheet, ComponentLink2URL=http://datasheets.maximintegrated.com/en/ds/DS18B20.pdf, ComponentLink3Description="Package Specification", ComponentLink3URL=http://pdfserv.maximintegrated.com/package_dwgs/21-0036.PDF, DatasheetVersion="Rev. 4", Interface=1-Wire, Mounting Technology="Surface Mount", Multi Droppable=Yes, PackageDescription="8-Pin Micro-MAX, Thin Shrink Small-Outline (U8+1), Body 3 x 3 mm, Pitch 0.65 mm", PackageReference=U8+1, PackageVersion="Rev. L, 08/2009", Packing="Tape and Reel", Parasite Pwr.=Yes, PartNumber=DS18B20U+T&R, RoHS=Pb-Free, Sensor Type=Local

## Via types
v1: diameter 1.27, hole 0.711, Top Layer to Bottom Layer, 44 vias

## Nets (pads, with @x,y where several pads share a name; then routed paths per layer and width w, separated by ;. In a path a pad name is that pad's centre, name@x,y a point inside that pad or via, vN(x,y) a via of type N, cw(c..) or ccw(c..) an arc to the next point about the centre after c; other vN are vias at no path point)
3.3V: C3.1 C4.1 C5.1 C8.2 J2.3 PT1.3 R7.2 R8.2 Ren1.2 RIO01.1 RPU4.2 U2.2 U3.4 ULR1.5 UT1.8 UT2.8 UT3.8 UT4.8 | length 375
  Top Layer w0.4: v1(-16.383,47.371) -14.579,47.371 -13.562,46.354 -13.562,46.292 C8.2@-13.254,45.984 ; U3.4 -13.511,43.774 -13.486,43.799 -13.486,45.676 -13.178,45.984 C8.2 C8.2@-13.154,45.83
  Top Layer w0.51: UT1.8 -130.945,37.12 -130.945,36.345 -130.932,36.332 -130.932,36.124 -130.576,35.768 -128.774,35.768 -127.392,37.15 UT2.8 -65.975,38.233 -65.676,38.532 -63.774,38.532 -62.453,37.211 PT1.3 ; RPU4.2 PT1.3 ; R8.2 -22.938,36.195 -25.086,38.343 -32.142,38.343 PT1.3 ; RIO01.1 -16.383,50.673 v1(-16.383,47.371) ; v1(-16.383,21.59) -11.43,21.59 -9.398,19.558 -9.398,19.533 -9.326,19.461 -9.326,3.103 -8.428,2.205 -7.445,2.205 U2.2 -7.239,2.021 -4.837,2.021 C4.1 C5.1 C3.1 3.482,2.032 4.253,2.803 ULR1.5 ; RIO01.1@-16.382,50.8 -11.938,50.8 ; J2.3 Ren1.2 -9.144,53.594 -11.938,50.8 ; UT4.8 127.689,35.814 66.272,35.814 66.226,35.768 64.424,35.768 64.068,36.124 64.068,36.332 64.055,36.345 64.055,37.12 UT3.8 20.381,37.15 16.51,41.021 16.51,45.466 14.224,47.752 -8.89,47.752 -11.938,50.8
  Bottom Layer w0.51: PT1.3 -32.131,38.354 -16.383,38.354 ; v1(-16.383,21.59) -16.383,38.354 ; v1(-16.383,47.371) -16.383,38.354
DATA_Temp: PT1.2 RPU4.1 U2.14 UT1.1 UT2.1 UT3.1 UT4.1 | length 290
  Top Layer w0.254: UT1.1 -130.975,32.048 -130.523,31.596 -98.271,31.596 -97.017,32.85 UT2.1 -65.975,32.048 -65.523,31.596 -33.274,31.596 RPU4.1 -33.112,31.555 -30.734,31.555 PT1.2 ; v1(-17.907,25.654) -17.632,25.654 -17.251,25.273 -7.874,25.273 v1(-3.429,20.828) -5.194,19.063 -5.194,19.006 -6.95,17.25 U2.14 ; v1(57.912,32.639) 63.934,32.639 UT3.1@64.025,32.73 ; UT3.1 UT3.1@64.025,32.73 ; UT4.1 129.01,32.85 127.756,31.596 64.477,31.596 64.025,32.048 UT3.1@64.025,32.73
  Bottom Layer w0.254: PT1.2 -27.397,33.874 -21.004,33.874 -17.907,30.777 v1(-17.907,25.654) ; v1(-3.429,20.828) 8.382,32.639 v1(57.912,32.639)
Enable3.3: R1.2 RPU3.1 U1.4 ULR1.2 | length 29
  Top Layer w0.51: RPU3.1 -2.286,9.144 -1.779,8.637 -1.779,7.875 -0.123,6.219 2.228,6.219 2.232,6.223 5.653,6.223 5.798,6.368 6.495,6.368 7.239,7.112 7.239,8.382 8.008,9.151 14.739,9.151 16.478,10.89 16.765,10.89 R1.2 17.329,11.454 U1.4
GND: C1.2 C2.2 C3.2 C4.2 C5.2 C6.2 C8.1 D1.1 J1.2 J1.3 J1.4 J2.1 PR12.1 PR22.1 PT1.1 QN1.2 QN2.2 R4.1 RPD1.2 RPD2.2 U1.2 U2.1 U2.15 U2.38 U2.39 U3.3 U3.7 U3.8 ULR1.3 UT1.4 UT2.4 UT3.4 UT4.4 | length 7.3
  Top Layer w0.254: U3.8 U3.7 ; U2.39@-15.9,8.46 U2.39@-14.5,8.46 ; U2.39@-14.5,7.06 U2.39@-14.5,8.46 ; U2.39@-14.5,9.86 U2.39@-14.5,8.46 ; U3.3 -13.886,43.138 -12.853,43.138 ; U2.39@-13.1,8.46 U2.39@-14.5,8.46
  other v1: -135.127,3.127 -120.127,3.127 -105.127,3.127 -90.127,3.127 -75.127,3.127 75,5 90,5 105,5 120,5 135,5 27.94,5.842 39.497,5.969 2.54,13.97 15.113,13.97 -21.59,25.146 -136.016,27.403 -121.016,27.403 -106.016,27.403 -91.016,27.403 -76.016,27.403 75,30 90,30 105,30 120,30 135,30 23.495,34.163 41.275,34.163 -13.335,34.925 -9.271,46.228
In+: R1.1 R3.1 R4.2 U1.3 | length 16
  Top Layer w0.51: U1.3 15.796,16.05 16.816,17.07 19.252,17.07 20.656,15.666 20.656,14.844 R3.1 R4.2 20.493,10.89 20.161,10.89 18.381,9.11 17.779,9.11 R1.1
In-: D1.3 R2.1 U1.1 | length 9.5
  Top Layer w0.51: D1.3 11.95,12 11,12.95 R2.1 11.507,17.11 11.903,17.11 12.723,17.93 14.909,17.93 U1.1
IO0: J2.6 RIO01.2 U2.25 | length 51.5
  Top Layer w0.51: U2.25 -24.45,17.25 -24.255,17.445 -24.255,17.745 -17.87,24.13 v1(-14.431,24.13) ; RIO01.2 J2.6
  Bottom Layer w0.51: J2.6 -16.51,53.213 -14.732,51.435 -14.732,24.637 -14.431,24.336 v1(-14.431,24.13)
NetC7_1: C7.1 R5.2 U3.1 | length 7.5
  Top Layer w0.4: U3.1 -13.872,41.797 -13.347,41.797 -13.347,41.795 -12.036,40.484 C7.1
  Top Layer w0.51: C7.1@-10,40.603 R5.2
NetC7_2: C7.2 R6.2 U3.2 | length 13.5
  Top Layer w0.39: U3.2@-13.716,42.516 C7.2
  Top Layer w0.4: C7.2@-10,42.524 -9.09,42.524
  Top Layer w0.51: -9.09,42.524 -8.52,41.954 -5.901,41.954 -5.602,41.656 -5.602,38.541 -6.746,37.397 R6.2
NetPR11_1: PR11.1 PR12.2 | length 7.5
  Top Layer w0.51: PR11.1 PR12.2
NetPR21_1: PR21.1 PR22.2 | length 7.5
  Top Layer w0.51: PR22.2 PR21.1
NetQN1_3: QN1.3 QP1.3 RPU1.2 | length 12
  Top Layer w0.51: QN1.3 32.969,17 33,17.031 RPU1.2 33.254,21.603 36.663,18.194 36.663,17.73 36.933,17.46 QP1.3
NetQN2_3: QN2.3 QP2.3 RPU2.2 | length 11.2
  Top Layer w0.51: QP2.3 -34.191,22.54 -33.254,21.603 RPU2.2 -32.746,21.603 -31.09,19.947 QN2.3
Powerline: J1.1 R5.1 R_shunt1.2 | length 14
  Top Layer w0.51: R5.1 -4.168,43.397 -3.567,43.998 R_shunt1.2 -2.453,43.784 J1.1
Powerline2: C1.1 C2.1 QP1.1 QP2.1 R2.2 R3.2 R6.1 R_shunt1.1 RPU1.1 RPU2.1 RPU3.2 U1.5 ULR1.1 | length 137.7
  Top Layer w0.51: QP2.1 -38.308,19.217 -40.843,21.752 -40.843,23.328 -40.295,23.876 -34.06,23.876 -34.046,23.89 -33.507,23.89 RPU2.1 -32.746,24.397 -28.568,28.575 -12.994,28.575 R6.1@-7.046,34.523 ; R6.1 -6.562,35.041 -5.599,35.041 -4.137,36.503 -4.137,37.728 -3.567,38.298 -1.767,38.298 -1.197,37.728 -1.197,34.722 2.029,31.496 C1.1 3.529,26.824 10.239,20.114 10.239,19.904 R2.2@10.585,19.558 ; RPU3.2 -2.286,11.938 -0.635,10.287 -0.635,8.763 0.889,7.239 C2.1 1.205,7.301 4.891,7.301 ULR1.1 4.953,13.604 10.746,19.397 R2.2 17.272,19.397 ; U1.5 17.329,19.34 17.272,19.397 ; R3.2 21,19.397 20.794,19.397 ; QP1.1 35.88,22.54 34.431,23.989 33.408,23.989 32.493,24.904 32.119,24.904 30.988,26.035 27.432,26.035 20.794,19.397 ; 17.272,19.397 20.794,19.397
ResistorIn: PR11.2 QP1.2 | length 19.8
  Top Layer w0.51: QP1.2 48.307,13.153 PR11.2
ResistorIn2: PR21.2 QP2.2 | length 19.8
  Top Layer w0.51: PR21.2 -48.307,13.153 QP2.2
RST_esp32: C6.1 J2.2 Ren1.1 U2.3 | length 64.5
  Top Layer w0.51: Ren1.1 -8.383,51.307 -8.002,51.307 -7.111,52.198 -6.476,52.198 C6.1 -6.35,52.578 J2.2 ; v1(-8.509,21.163) -8.509,17.976 -8.509,3.889 -8.095,3.475 -7.445,3.475 U2.3
  Bottom Layer w0.51: v1(-8.509,21.163) -8.364,21.308 -8.364,21.735 -6.35,23.749 J2.2
Rx_esp32: J2.5 U2.34 | length 60.8
  Top Layer w0.254: v1(-26.541,6.5) -26.266,6.5 -25.732,5.966 -24.896,5.966 U2.34
  Bottom Layer w0.254: v1(-26.541,6.5) -25.123,6.5 -11.938,19.685 -11.938,55.499 J2.5
SCL_esp32: R7.1 U2.36 U3.5 | length 51
  Top Layer w0.254: v1@-26.818,2.5 -26.715,2.603 -25.717,2.603 -25.373,2.946 -25.373,2.957 -25.05,3.28 U2.36 ; R7.1 -22.86,33.261 v1(-22.86,30.226) ; R7.1@-22.746,33.401 -21.73,34.417 -18.669,34.417 -17.526,35.56 -17.526,42.976 -16.766,43.736 -16.139,43.736 U3.5
  Bottom Layer w0.254: v1(-26.543,2.5) -27.559,3.516 -27.559,18.288 -22.86,22.987 v1(-22.86,30.226)
SDA_esp32: R8.1 U2.33 U3.6 | length 42.2
  Top Layer w0.254: v1(-26.541,8.5) -26.467,8.5 -25.38,7.413 -25.073,7.413 U2.33 ; v1(-19.939,30.226) -19.939,33.34 R8.1 -19.365,34.036 -18.415,34.036 -17.145,35.306 -17.145,42.636 -16.656,43.124 U3.6
  Bottom Layer w0.254: v1@-26.541,8.509 -26.541,18.544 -19.939,25.146 v1(-19.939,30.226)
Signalline1: QN1.1 RPD1.1 U2.24 | length 61.9
  Top Layer w0.254: U2.24@-21.715,18.2 U2.24 -21.715,18.8 -17.653,22.862 -6.987,22.862 v1(-5.588,21.463) ; v1(27.77,17.95) QN1.1 31.09,19.513 29.889,20.714 29.889,20.968 29.254,21.603 RPD1.1
  Bottom Layer w0.254: v1(-5.588,21.463) -5.588,21.293 -2.2,17.905 27.725,17.905 v1(27.77,17.95)
Signalline2: QN2.1 RPD2.1 U2.29 | length 17.3
  Top Layer w0.254: QN2.1 -32.78,17.82 -32.78,17.429 -31.459,16.108 -30.388,16.108 ; RPD2.1 -28,18.496 -30.388,16.108 ; U2.29 -26.45,12.17 -30.388,16.108
Tx_esp32: J2.4 U2.35 | length 61.1
  Top Layer w0.254: v1(-26.541,4.5) -26.491,4.55 U2.35
  Bottom Layer w0.254: v1(-26.541,4.5) -11.43,19.611 J2.4
pads on no net: D1.2 U2.4 U2.5 U2.6 U2.7 U2.8 U2.9 U2.10 U2.11 U2.12 U2.13 U2.16 U2.17 U2.18 U2.19 U2.20 U2.21 U2.22 U2.23 U2.26 U2.27 U2.28 U2.30 U2.31 U2.32 U2.37 ULR1.4 UT1.2 UT1.3 UT1.5 UT1.6 UT1.7 UT2.2 UT2.3 UT2.5 UT2.6 UT2.7 UT3.2 UT3.3 UT3.5 UT3.6 UT3.7 UT4.2 UT4.3 UT4.5 UT4.6 UT4.7

## Polygon pours and split planes (outlines as drawn)
GND on Bottom Layer "GND_L02_P001" (solid, remove dead copper, pour order 1): -151.003,74.422 -151.003,76.327 159.766,76.327 159.766,-16.637 -151.003,-16.637
GND on Top Layer "GND_L01_P002" (solid, remove dead copper, pour order 2): -151.003,76.2 159.766,76.2 159.766,-16.764 -151.003,-16.764

## Keep-outs
Keep-Out Layer:
  lines w0.256: -140.082,0.762 ccw(c-139.192,0.762) -139.192,-0.128 ; -140.082,0.762 ccw(c-139.192,0.762) -140.082,0.762 ; -140.082,0.762 -140.082,39.37 cw(c-139.192,39.37) -139.194,40.26 ; -140.082,0.762 -140.082,0.762 ; -139.194,40.26 cw(c-139.192,40.132) -139.192,40.26 ; -139.194,40.26 cw(c-139.192,39.37) -139.192,40.26 ; -139.192,-0.128 ccw(c-139.192,0.762) -139.192,-0.128 ; -139.192,-0.128 139.192,-0.128 ccw(c139.192,0.762) 140.082,0.761 ; -139.192,-0.128 -139.192,-0.128 ; -139.192,40.26 ccw(c-139.192,40.132) -139.192,40.26 ; -139.192,40.26 -19.685,40.26 ccw(c-19.685,41.021) -18.924,41.021 ; -18.924,41.021 cw(c-18.796,41.021) -18.924,41.022 ; -18.924,41.021 -18.924,41.022 ; -18.924,41.022 -18.924,59.309 cw(c-17.907,59.309) -17.909,60.326 ; -17.909,60.326 cw(c-17.907,60.198) -17.907,60.326 ; -17.909,60.326 cw(c-17.907,59.309) -17.907,60.326 ; -17.907,60.326 ccw(c-17.907,60.198) -17.907,60.326 ; -17.907,60.326 19.177,60.326 ; 19.177,60.326 cw(c19.177,60.198) 19.178,60.326 ; 19.177,60.326 cw(c19.177,59.309) 19.178,60.326 ; 19.178,60.326 cw(c19.177,59.309) 20.194,59.311 ; 20.194,59.309 ccw(c20.066,59.309) 20.194,59.311 ; 20.194,59.309 ccw(c19.177,59.309) 20.194,59.311 ; 20.194,59.309 ccw(c19.177,59.309) 20.194,59.309 ; 20.194,59.309 20.194,41.021 ccw(c20.955,41.021) 20.955,40.26 ; 20.955,40.26 ccw(c20.955,40.132) 20.955,40.26 ; 20.955,40.26 ccw(c20.955,40.132) 20.955,40.26 ; 20.955,40.26 138.938,40.26 ; 138.938,40.26 cw(c138.938,40.132) 138.939,40.26 ; 138.938,40.26 ccw(c138.938,39.116) 138.938,40.26 ; 138.938,40.26 cw(c138.938,39.116) 138.939,40.26 ; 138.939,40.26 cw(c138.938,39.116) 140.082,39.118 ; 140.082,0.761 ccw(c139.954,0.762) 140.082,0.762 ; 140.082,0.761 ccw(c139.192,0.762) 140.082,0.762 ; 140.082,0.762 ccw(c139.192,0.762) 140.082,0.762 ; 140.082,0.762 ccw(c139.192,0.762) 140.082,0.762 ; 140.082,0.762 140.082,39.116 ; 140.082,39.116 ccw(c139.954,39.116) 140.082,39.118 ; 140.082,39.116 ccw(c138.938,39.116) 140.082,39.116 ; 140.082,39.116 ccw(c138.938,39.116) 140.082,39.116 ; 140.082,39.116 ccw(c138.938,39.116) 140.082,39.118

## Silkscreen, mask and mechanical layers (free items; w line width, h text height)
Top Overlay:
  text "IO0" at -17.526,55.372 h0.7
  text "Rx" at -14.605,55.372 h0.7
  text "Tx" at -12.065,55.372 h0.7
  text "3.3" at -9.779,55.372 h0.7
  text "RST" at -7.112,55.372 h0.7
  text "GND" at -4.572,55.372 h0.7

## Text inside footprints (layer, text, board x,y; h text height)
C1: Top Overlay "+" at -0.021,31.996 h0.8 r180